# Altium PCB PCB1.PcbDoc
Units mm, origin at the board's own origin, x right, y up, seen from the top; angles counter-clockwise.
Board outline 41 x 58.5 mm, 2 copper layers (Top Layer, Bottom Layer); 36 components, 23 nets, 142 pads, 0 vias.
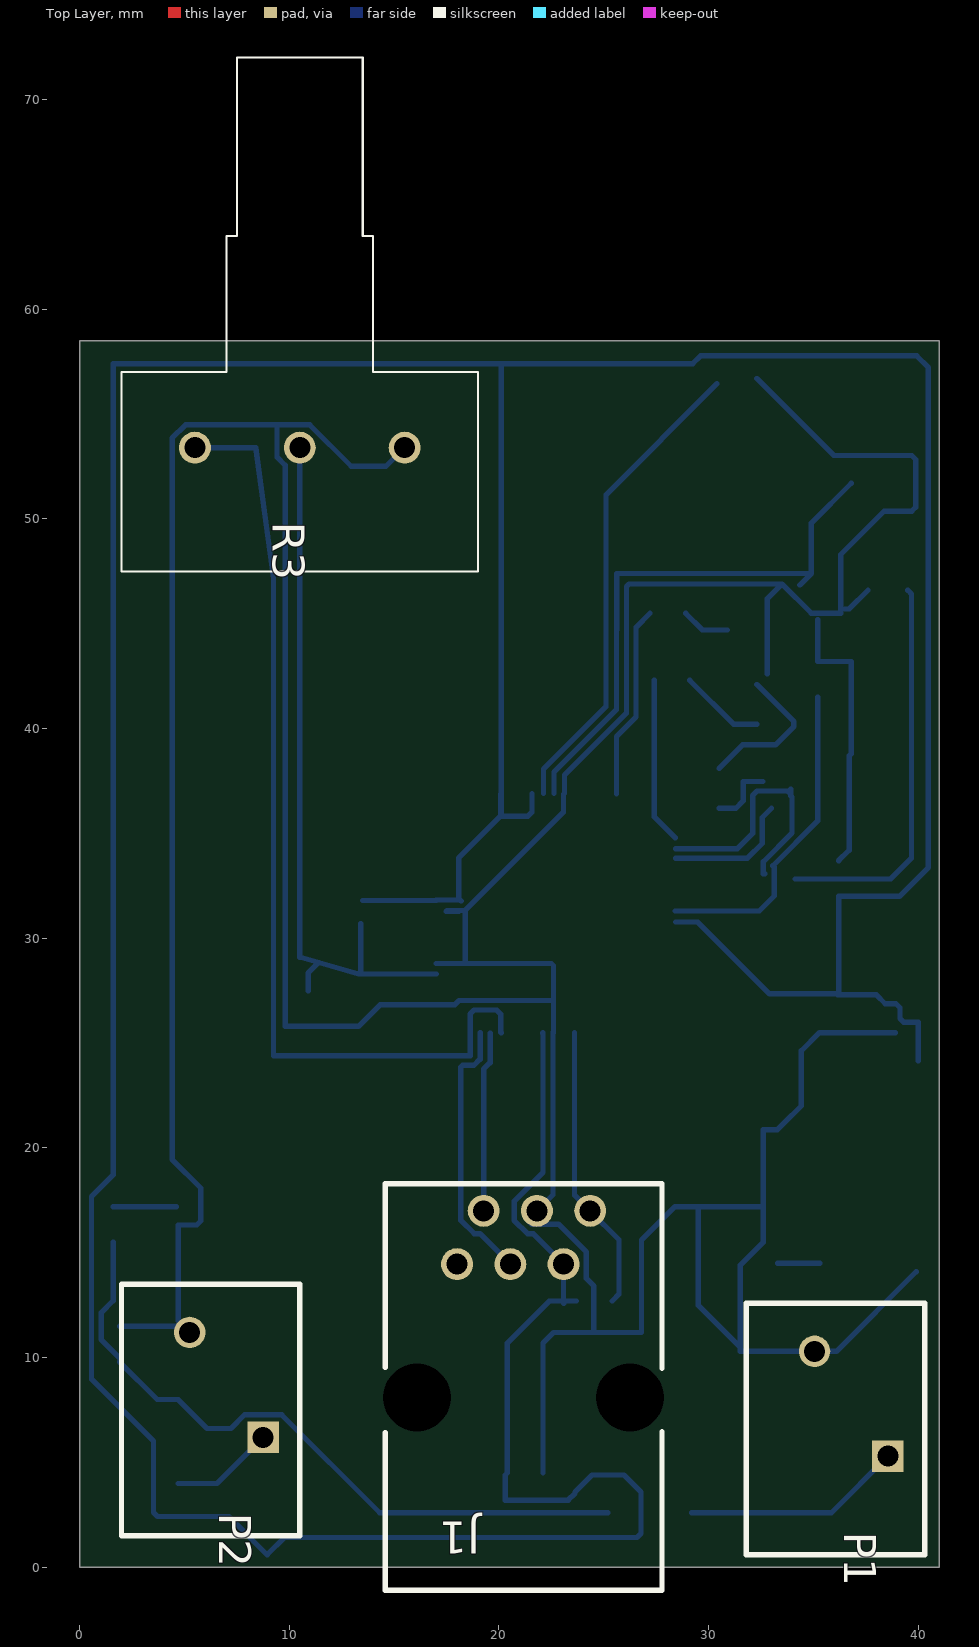
[diagram p0: Top Layer view]
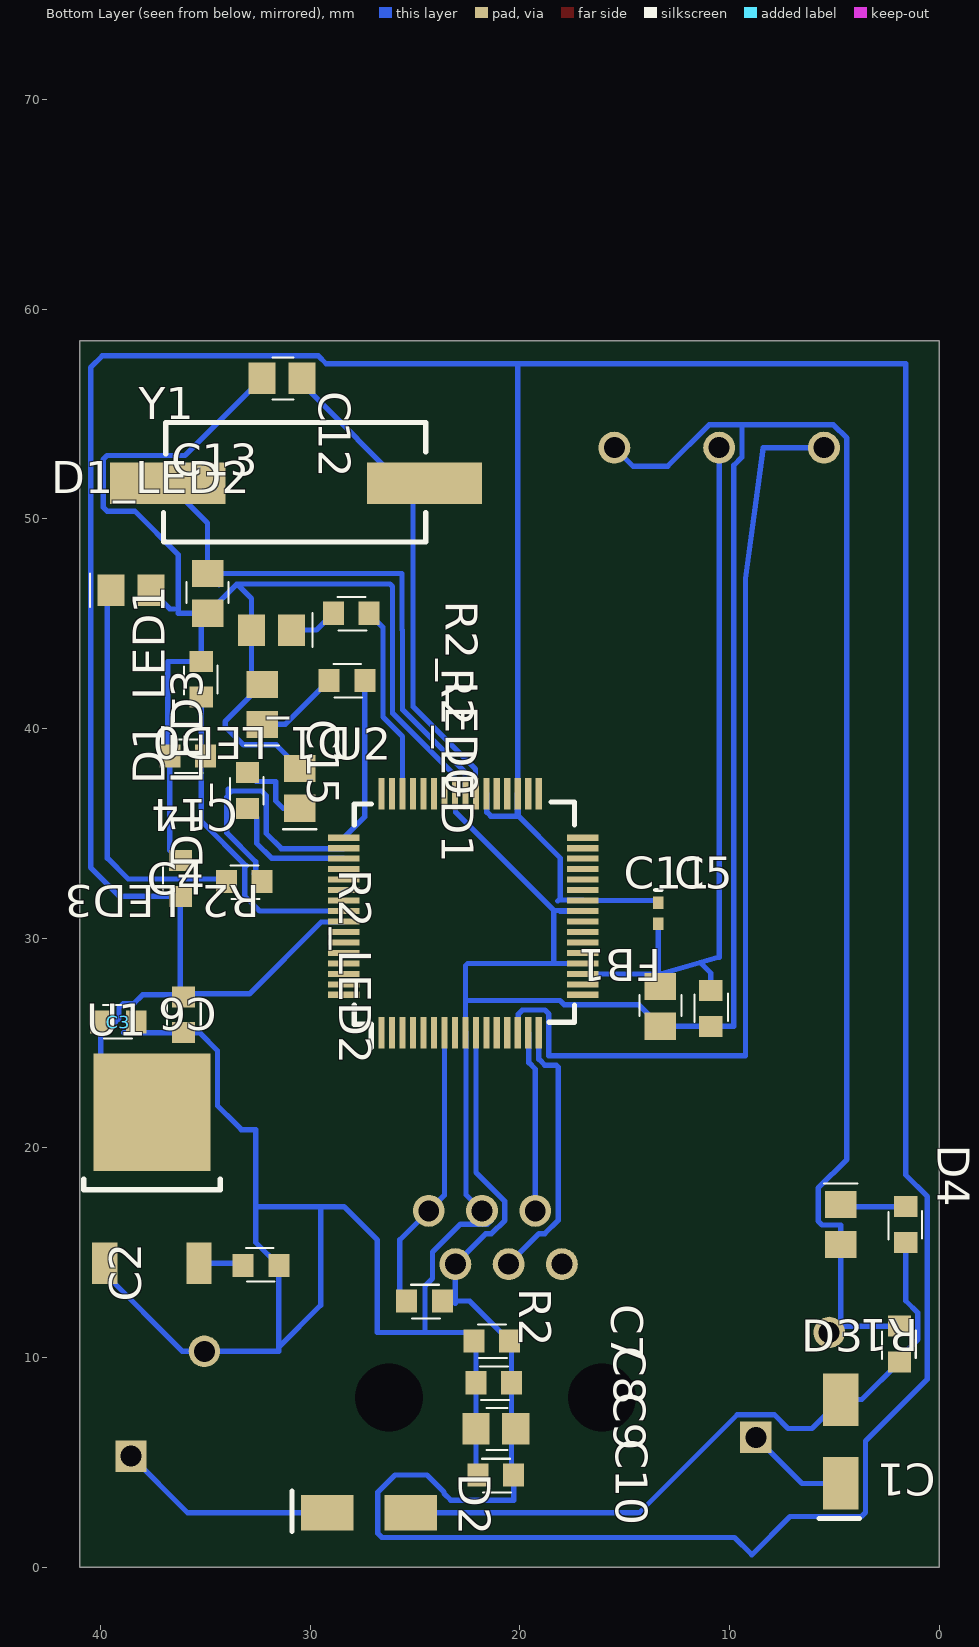
[diagram p1: Bottom Layer view, seen from below]

## Layer stack, top to bottom
Top Solder: solder mask 0.0102, Solder Resist, Dk 3.5
Top Layer: signal copper 0.0356
Dielectric 1: dielectric 0.32, FR-4, Dk 4.8
Bottom Layer: signal copper 0.0356
Bottom Solder: solder mask 0.0102, Solder Resist, Dk 3.5

## Board outline
0,0 41,0 41,58.5 0,58.5

## Design rules (kind name [scope] priority, off if disabled: settings)
Clearance [All] p1: gap=0.2
HoleSize [All] p1: absolutevalues=TRUE maxlimit=2.54 minlimit=0.3 maxpercent=80.000 minpercent=20.000
PolygonConnect [All] p1: connectstyle=Relief reliefconductorwidth=0.254 reliefentries=4 polygonreliefangle="90 Angle" airgapwidth=0.254
RoutingVias [All] p1: holewidth=0.7 width=1.27 viastyle="Through Hole" minholewidth=0.3 minwidth=0.7 maxholewidth=1 maxwidth=5
SolderMaskExpansion [All] p1: expansion=0.102
UnpouredPolygon [All] p1: allowunpoured=FALSE
Width [All] p1: maxlimit=5 minlimit=0.2 preferedwidth=0.254
28 further rules are at their usual default settings.

## Classes and differential pairs
component class LED0: D1_LED0 R2_LED0
component class LED1: D1_LED1 R2_LED1
component class LED2: D1_LED2 R2_LED2
component class LED3: D1_LED3 R2_LED3
component class PIC: C6 C7 C8 C9 C10 C11 C12 C13 C14 C15 J1 R2 U2 Y1
component class POWER: C1 C2 C3 C4 C5 D2 D3 D4 FB1 P1 P2 R1 U1
component class TP2: R3
net class LED[0..3]: LED0 LED1 LED2 LED3
channel class led: LED0 LED1 LED2 LED3

## Components (designator, comment, footprint, x,y, rotation, side; value= is the part's Value field where it differs from the comment)
C1 "10uf" CAPC1608N 1.9,11.5 r270 bottom
C2 "10uF" CAPC1608N 31.5,14.4 r0 bottom
C3 "10uF" CAPC1608N 38.3,26 r0 bottom
C4 "1uF" CAPC1608N 36.05,25.5 r90 bottom
C5 "100nF" CAPC1608N 10.9,25.8 r90 bottom
C6 "100nF" CAPC1608N 36.2,33.7 r270 bottom
C7 "100nF" CAPC1608N 22.2,10.8 r180 bottom
C8 "100nF" CAPC1608N 22.1,8.8 r180 bottom
C9 "100nF" CAPC2012N 22.1,6.6 r180 bottom
C10 "100nF" CAPC1608N 22,4.4 r180 bottom
C11 "100nF" CAPC2012N 13.3,25.8 r90 bottom
C12 "20pF" CAPC2012N 32.3,56.7 r180 bottom
C13 "20pF" CAPC2012N 34.9,45.5 r90 bottom
C14 "10uF" CAPC1608N 35.2,43.2 r270 bottom
C15 "1uF" CAPC1608N 36.7,38.7 r180 bottom
D1_LED0 "Green LED" "LED 0805" 30.9,44.7 r0 bottom (schematic designator D1)
D1_LED1 "Green LED" "LED 0805" 32.3,40.2 r90 bottom (schematic designator D1)
D1_LED2 "Green LED" "LED 0805" 39.5,46.6 r180 bottom (schematic designator D1)
D1_LED3 "Green LED" "LED 0805" 30.5,36.2 r90 bottom (schematic designator D1)
D2 "GF1A" SMA/DO-214AC_21 29.2,2.6 r180 bottom
D3 "GF1A" SMA/DO-214AC_21 4.7,4 r90 bottom
D4 "Green LED" "LED 0805" 4.7,17.3 r270 bottom
FB1 "600r" 0402-A 13.4,31.2 r270 bottom
J1 "Program / Debug" RJ12_90 18,17 r270 top
P1 "12V Main" PHOENIX_1985195 31.8,0.6 r0 top
P2 "12V Battery" PHOENIX_1985195 2,1.5 r0 top
R1 "470r" RESC1608N 1.6,17.2 r270 bottom
R2 "4.7" RESC1608N 25.4,12.7 r180 bottom
R2_LED0 "330r" RESC1608N 28.9,45.5 r180 bottom (schematic designator R2)
R2_LED1 "330r" RESC1608N 29.1,42.3 r180 bottom (schematic designator R2)
R2_LED2 "330r" RESC1608N 34,32.7 r180 bottom (schematic designator R2)
R2_LED3 "330r" RESC1608N 33,37.9 r270 bottom (schematic designator R2)
R3 "1K" PDB181-K415K-102A2 2,47.5 r0 top
U1 "AP1117" TD03B_N 39.8,14.5 r180 bottom
U2 "PIC32MX764F128H-I/PT" QFP50P1200X1200X120-64 28.4,25.5 r180 bottom
Y1 "8MHz" "HC49/4H SMX CRYSTAL" 36.8,51.7 r180 bottom

## Footprints (in the part's own frame and the unit in brackets; to place one, negate y for a bottom-side part, rotate by r counter-clockwise, add the part's x,y. Pads: shape width x height; smd on the part's side, far side on the other; paste and mask are expansions set on the pad)
0402-A [mm] "Chip Inductor, Body 1.0x0.5mm, IPC High Density"
  rect 0.6x0.5 smd: 1(-0.5,0) 2(0.5,0)
  silkscreen extent -1.1,-0.15 -1.1,0.15, body extent -0.55,-0.3 0.55,0.3, height 0.55
CAPC1608N [mm]
  rect 1x1.1 smd: 1(0,0) 2(1.7,0)
  silkscreen extent 0.2,-0.82 1.58,0.77
CAPC2012N [mm]
  rect 1.3x1.5 smd: 1(0,0) 2(1.9,0)
  silkscreen extent 0.5,-1 1.5,1
"HC49/4H SMX CRYSTAL" [mm]
  rect 5.5x2 smd: 1(0,0) 2(12.25,0)
  silkscreen extent -0.2,-2.8 12.3,2.9
"LED 0805" [mm]
  rect 1.3x1.5 smd: 1(0,0) 2(1.9,0)
  silkscreen extent -1,-0.8 -1,0.8
PDB181-K415K-102A2 [mm]
  round 1.524 hole 1: 1(13.5,5.9) 2(8.5,5.9) 3(3.5,5.9)
  silkscreen extent 0,0 17,24.5
PHOENIX_1985195 [mm]
  rect 1.5x1.5 hole 1: 1(6.75,4.7)
  round 1.5 hole 1: 2(3.25,9.7)
  silkscreen extent 0,0 8.5,12
QFP50P1200X1200X120-64 [mm]
  rect 0.3x1.5 smd: 1(1.8,0) 2(2.3,0) 3(2.8,0) 4(3.3,0) 5(3.8,0) 6(4.3,0) 7(4.8,0) 8(5.3,0) 9(5.8,0) 10(6.3,0) 11(6.8,0) 12(7.3,0) 13(7.8,0) 14(8.3,0) 15(8.8,0) 16(9.3,0) 33(9.3,11.4) 34(8.8,11.4) 35(8.3,11.4) 36(7.8,11.4) 37(7.3,11.4) 38(6.8,11.4) 39(6.3,11.4) 40(5.8,11.4) 41(5.3,11.4) 42(4.8,11.4) 43(4.3,11.4) 44(3.8,11.4) 45(3.3,11.4) 46(2.8,11.4) 47(2.3,11.4) 48(1.8,11.4)
  rect 1.5x0.3 smd: 17(11.4,1.8) 18(11.4,2.3) 19(11.4,2.8) 20(11.4,3.3) 21(11.4,3.8) 22(11.4,4.3) 23(11.4,4.8) 24(11.4,5.3) 25(11.4,5.8) 26(11.4,6.3) 27(11.4,6.8) 28(11.4,7.3) 29(11.4,7.8) 30(11.4,8.3) 31(11.4,8.8) 32(11.4,9.3) 49(0,9.3) 50(0,8.8) 51(0,8.3) 52(0,7.8) 53(0,7.3) 54(0,6.8) 55(0,6.3) 56(0,5.8) 57(0,5.3) 58(0,4.8) 59(0,4.3) 60(0,3.8) 61(0,3.3) 62(0,2.8) 63(0,2.3) 64(0,1.8)
  silkscreen extent 0.5,-0.7 11,11
RESC1608N [mm]
  rect 1x1.1 smd: 1(0,0) 2(1.7,0)
  silkscreen extent 0.2,-0.82 1.58,0.77
RJ12_90 [mil]
  round 60 hole 39.37: 1(0,250) 2(100,200) 3(0,150) 4(100,100) 5(0,50) 6(100,0)
  round 60 hole 127.95 unplated: ""(350.39,324.8) ""(350.39,-75.2)
  silkscreen extent -51,-135 713,385
SMA/DO-214AC_21 [mm]
  rect 2.5x1.7 smd: 1(0,0) 2(4,0)
  silkscreen extent -1.68,-0.87 -1.68,1.02
TD03B_N [mm]
  rect 1.2x2 smd: 1(0,0) 3(4.5,0)
  rect 5.6x5.6 smd: 4(2.25,7.2)
  silkscreen extent -1,3.5 5.5,4

## Part data
C1 C2 C3 C4 C5 C6 C7 C8 C9 C10 C11 C12 C13 C14 C15: library part Cap, "Capacitor"
D1_LED0 D1_LED1 D1_LED2 D1_LED3 D4: library part LED0, "Typical INFRARED GaAs LED"
D2 D3: library part Diode, "Default Diode"
FB1: library part Inductor, "Inductor"
J1: library part "Header 6", "Header, 6-Pin"
P1 P2: library part "Header 2", "Header, 2-Pin"
R1 R2 R2_LED0 R2_LED1 R2_LED2 R2_LED3: library part Res1, "Resistor"
R3: library part RPot, "Potentiometer"
Y1: library part XTAL, "Crystal Oscillator"

## Nets (pads, with @x,y where several pads share a name; then routed paths per layer and width w, separated by ;. In a path a pad name is that pad's centre, name@x,y a point inside that pad or via, vN(x,y) a via of type N, cw(c..) or ccw(c..) an arc to the next point about the centre after c; other vN are vias at no path point)
5V: C1.2 D2.2 D3.2 R1.2 | length 32.9
  Bottom Layer w0.254: R1.2 1.6,12.712 1.023,12.135 1.023,10.865 C1.2@1.9,9.988 ; C1.2 3.7,8 D3.2 6.077,6.623 7.211,6.623 7.865,7.277 9.635,7.277 14.312,2.6 D2.2
ALIM: D2.1 P1.1 | length 10.5
  Bottom Layer w0.254: D2.1 35.85,2.6 P1.1
BATTERY: D3.1 P2.1 | length 5
  Bottom Layer w0.254: D3.1 6.55,4 P2.1
GND: C1.1 C2.1 C3.1 C4.1 C5.1 C6.1 C7.1 C8.1 C9.1 C10.1 C11.1 C12.1 C13.1 C14.1 C15.1 D1_LED0.2 D1_LED1.2 D1_LED2.2 D1_LED3.2 D4.2 J1.3 P1.2 P2.2 R3.1 U1.1 U2.9 U2.20 U2.25 U2.41 | length 265.8
  Bottom Layer w0.254: C1.1 P2.2@4.95,11.5 ; 4.7,11.75 D4.2 4.7,16.323 5.585,16.323 5.777,16.515 5.777,18.085 4.411,19.451 4.411,53.851 5.049,54.489 10.976,54.489 12.954,52.511 14.611,52.511 R3.1 ; 9.411,54.378 9.411,52.949 9.8,52.56 9.8,25.8 C5.1 C11.1 14.323,26.823 17.885,26.823 18.093,27.031 22.569,27.031 22.6,27 ; U2.20 22.501,28.8 ; 18.077,31.277 17.477,31.277 17.523,31.323 18.386,31.323 ; 18.386,28.814 18.386,31.323 ; C10.1@22.1,4.5 C9.1 C8.1 22.1,10.7 C7.1 22.6,11.2 24.5,11.2 ; U2.9@22.577,25.477 22.577,17.767 J1.3 21.361,16.551 21.547,16.365 22.835,16.365 24.169,15.031 24.169,13.77 24.527,13.412 24.527,11.227 24.5,11.2 ; U2.9@22.577,25.523 U2.9 22.6,27 ; 22.6,28.7 22.6,27 ; U2.41@23.077,36.877 23.077,36.015 18.386,31.323 ; U2.41@23.123,36.923 23.123,37.785 26.077,40.739 26.077,46.777 26.2,46.9 33.5,46.9 ; D1_LED3.2 31.623,39.223 33.185,39.223 34.062,40.1 34.062,40.338 D1_LED1.2 ; C12.1 35.973,53.027 39.685,53.027 39.877,52.835 39.877,50.565 39.685,50.373 38.373,50.373 36.3,48.3 36.3,45.5 C13.1 33.5,46.9 ; 32.5,17.2 29.5,17.2 ; D1_LED1.2@32.8,42.6 D1_LED0.2 32.8,46.2 33.5,46.9 ; C13.1@35.2,45.2 C14.1 36.8,43.2 36.8,38.8 C15.1 36.7,34.2 C6.1 ; 36.5,45.7 36.7,45.7 D1_LED2.2 ; 38.9,25.5 C4.1 35.288,25.5 34.423,24.635 34.423,22.011 33.6,21.188 33.285,20.873 32.6,20.873 32.6,15.5 C2.1 31.5,10.5 ; U1.1@39.9,14.1 36.1,10.3 P1.2 31.5,10.3 31.5,10.5 ; 24.5,11.2 26.8,11.2 26.8,15.6 28.4,17.2 29.5,17.2 ; 29.5,17.2 29.5,12.5 31.5,10.5
LED0: R2_LED0.2 U2.46 | length 9.3
  Bottom Layer w0.254: U2.46 25.6,39.62 26.531,40.551 26.531,44.831 R2_LED0.2
LED1: R2_LED1.2 U2.49 | length 7.9
  Bottom Layer w0.254: R2_LED1.2 27.4,35.8 U2.49
LED2: R2_LED2.2 U2.50 | length 12.5
  Bottom Layer w0.254: U2.50@28.423,34.277 31.377,34.277 32.1,35 32.1,36.812 32.315,37.027 33.839,37.027 ; R2_LED2.2@32.673,33.073 32.602,33.073 32.602,33.644 33.977,35.019 33.977,36.735 33.912,36.8 33.912,37.1 33.839,37.027 ; 33.785,36.973 33.839,37.027
LED3: R2_LED3.2 U2.51 | length 6.3
  Bottom Layer w0.254: U2.51@28.423,33.823 31.853,33.823 32.554,34.524 32.554,35.754 R2_LED3.2
MCLR: J1.1 R2.1 U2.7 | length 13.8
  Bottom Layer w0.254: U2.7 23.6,17.75 J1.1 25.727,15.623 25.727,13.027 R2.1
NetC14_2: C14.2 C15.2 U2.56 | length 15.4
  Bottom Layer w0.254: U2.56 32.412,31.3 33.127,32.015 33.127,33.385 33.056,33.456 35.2,35.6 C14.2
NetD1_LED0_1: D1_LED0.1 R2_LED0.1 | length 2.3
  Bottom Layer w0.254: R2_LED0.1 29.7,44.7 D1_LED0.1
NetD1_LED1_1: D1_LED1.1 R2_LED1.1 | length 4.1
  Bottom Layer w0.254: R2_LED1.1 31.2,40.2 D1_LED1.1
NetD1_LED2_1: D1_LED2.1 R2_LED2.1 | length 18.8
  Bottom Layer w0.254: R2_LED2.1@34.127,32.827 38.681,32.827 39.677,33.823 39.677,46.423 D1_LED2.1
NetD1_LED3_1: D1_LED3.1 R2_LED3.1 | length 3.2
  Bottom Layer w0.254: D1_LED3.1 31.3,36.2 31.646,36.546 31.646,37.481 R2_LED3.1@32.581,37.481
NetD4_1: D4.1 R1.1 | length 3
  Bottom Layer w0.254: R1.1 D4.1@4.6,17.2
NetR3_3: R3.3 U2.14 | length 45.8
  Bottom Layer w0.254: R3.3 8.4,53.4 9.246,47.154 9.246,24.4 18.623,24.4 18.623,26.385 18.815,26.577 19.886,26.577 20.077,26.385 20.077,25.523 U2.14
PGC: J1.5 U2.15 | length 8.6
  Bottom Layer w0.254: J1.5 19.27,23.762 19.577,24.07 U2.15@19.577,25.477
PGD: J1.4 U2.16 | length 12.9
  Bottom Layer w0.254: U2.16 19.1,24.235 18.812,23.946 18.267,23.946 18.181,23.86 18.181,16.549 18.819,15.911 19.089,15.911 J1.4
V3P3: C3.2 C4.2 C6.2 C7.2 C8.2 C9.2 C10.2 FB1.1 J1.2 R2.2 U1.4 U2.10 U2.26 U2.35 U2.38 U2.57 | length 239.4
  Bottom Layer w0.254: FB1.1@13.5,31.8 U2.26 ; U2.26@17,31.823 18.077,31.823 ; 18.198,31.777 18.152,31.823 18.077,31.823 ; U2.35@20.077,36.877 20.077,35.823 18.077,33.823 18.077,31.823 ; 20.101,57.4 29.238,57.4 29.615,57.777 39.923,57.777 40.477,57.223 40.477,33.381 39.096,32 C6.2 36.2,27.35 32.904,27.35 29.477,30.777 U2.57@28.423,30.777 ; C10.2 20.3,3.2 23.3,3.2 23.623,3.523 23.623,3.585 24.438,4.4 25.962,4.4 26.777,3.585 26.777,1.615 26.585,1.423 9.765,1.423 8.942,0.6 7.119,2.423 3.715,2.423 3.523,2.615 3.523,6.019 0.569,8.973 0.569,17.681 1.6,18.713 1.6,57.4 20.1,57.4 U2.35 20.123,36.9 20.123,35.823 21.386,35.823 21.577,36.015 U2.38@21.577,36.9 ; C10.2@20.4,4.5 C8.2 20.4,10.7 C7.2 22.4,12.7 23.08,12.7 ; U2.10@22.077,25.477 U2.10 22.1,18.831 20.721,17.451 20.721,16.549 21.359,15.911 21.629,15.911 J1.2 23.08,12.7 ; 23.08,12.58 23.1,12.6 ; 23.08,12.62 23.08,12.7 ; R2.2 23.08,12.7 ; C4.2@36.15,27.3 38,27.3 38.423,26.877 38.935,26.877 39.127,26.685 39.127,26.173 39.3,26 C3.2 U1.4@40,24.15
V3P3A: C5.2 C11.2 FB1.2 R3.2 U2.19 | length 34.8
  Bottom Layer w0.254: R3.2 10.5,51.4 10.5,29.1 11.4,28.843 ; C5.2 10.9,28.343 11.4,28.843 ; 13.4,28.4 FB1.2 ; U2.19 13.3,28.3 11.4,28.843
V5: C2.2 U1.3 | length 2
  Bottom Layer w0.254: C2.2@33.3,14.5 U1.3
X1: C12.2 U2.39 Y1.2 | length 23
  Bottom Layer w0.254: U2.39@22.123,36.923 22.123,38.07 25.1,41.047 25.1,51.15 C12.2@30.4,56.449
X2: C13.2 U2.40 Y1.1 | length 26.9
  Bottom Layer w0.254: U2.40@22.623,36.923 22.623,37.927 25.6,40.904 25.6,44.7 25.623,44.7 25.623,47.4 C13.2 ; C13.2@34.35,46.85 C13.2 ; Y1.1 34.9,49.8 C13.2
pads on no net: J1. J1.6 U2.1 U2.2 U2.3 U2.4 U2.5 U2.6 U2.8 U2.11 U2.12 U2.13 U2.17 U2.18 U2.21 U2.22 U2.23 U2.24 U2.27 U2.28 U2.29 U2.30 U2.31 U2.32 U2.33 U2.34 U2.36 U2.37 U2.42 U2.43 U2.44 U2.45 U2.47 U2.48 U2.52 U2.53 U2.54 U2.55 U2.58 U2.59 U2.60 U2.61 U2.62 U2.63 U2.64